# Altium PCB pcb.PcbDoc
Units mil, origin at the board's own origin, x right, y up, seen from the top; angles counter-clockwise.
Board outline 3868.3 x 3160.12 mil, 2 copper layers (Top Layer, Bottom Layer); 10 components, 15 nets, 186 pads, 0 vias.
Unrouted connection lines stored in the file: 26.
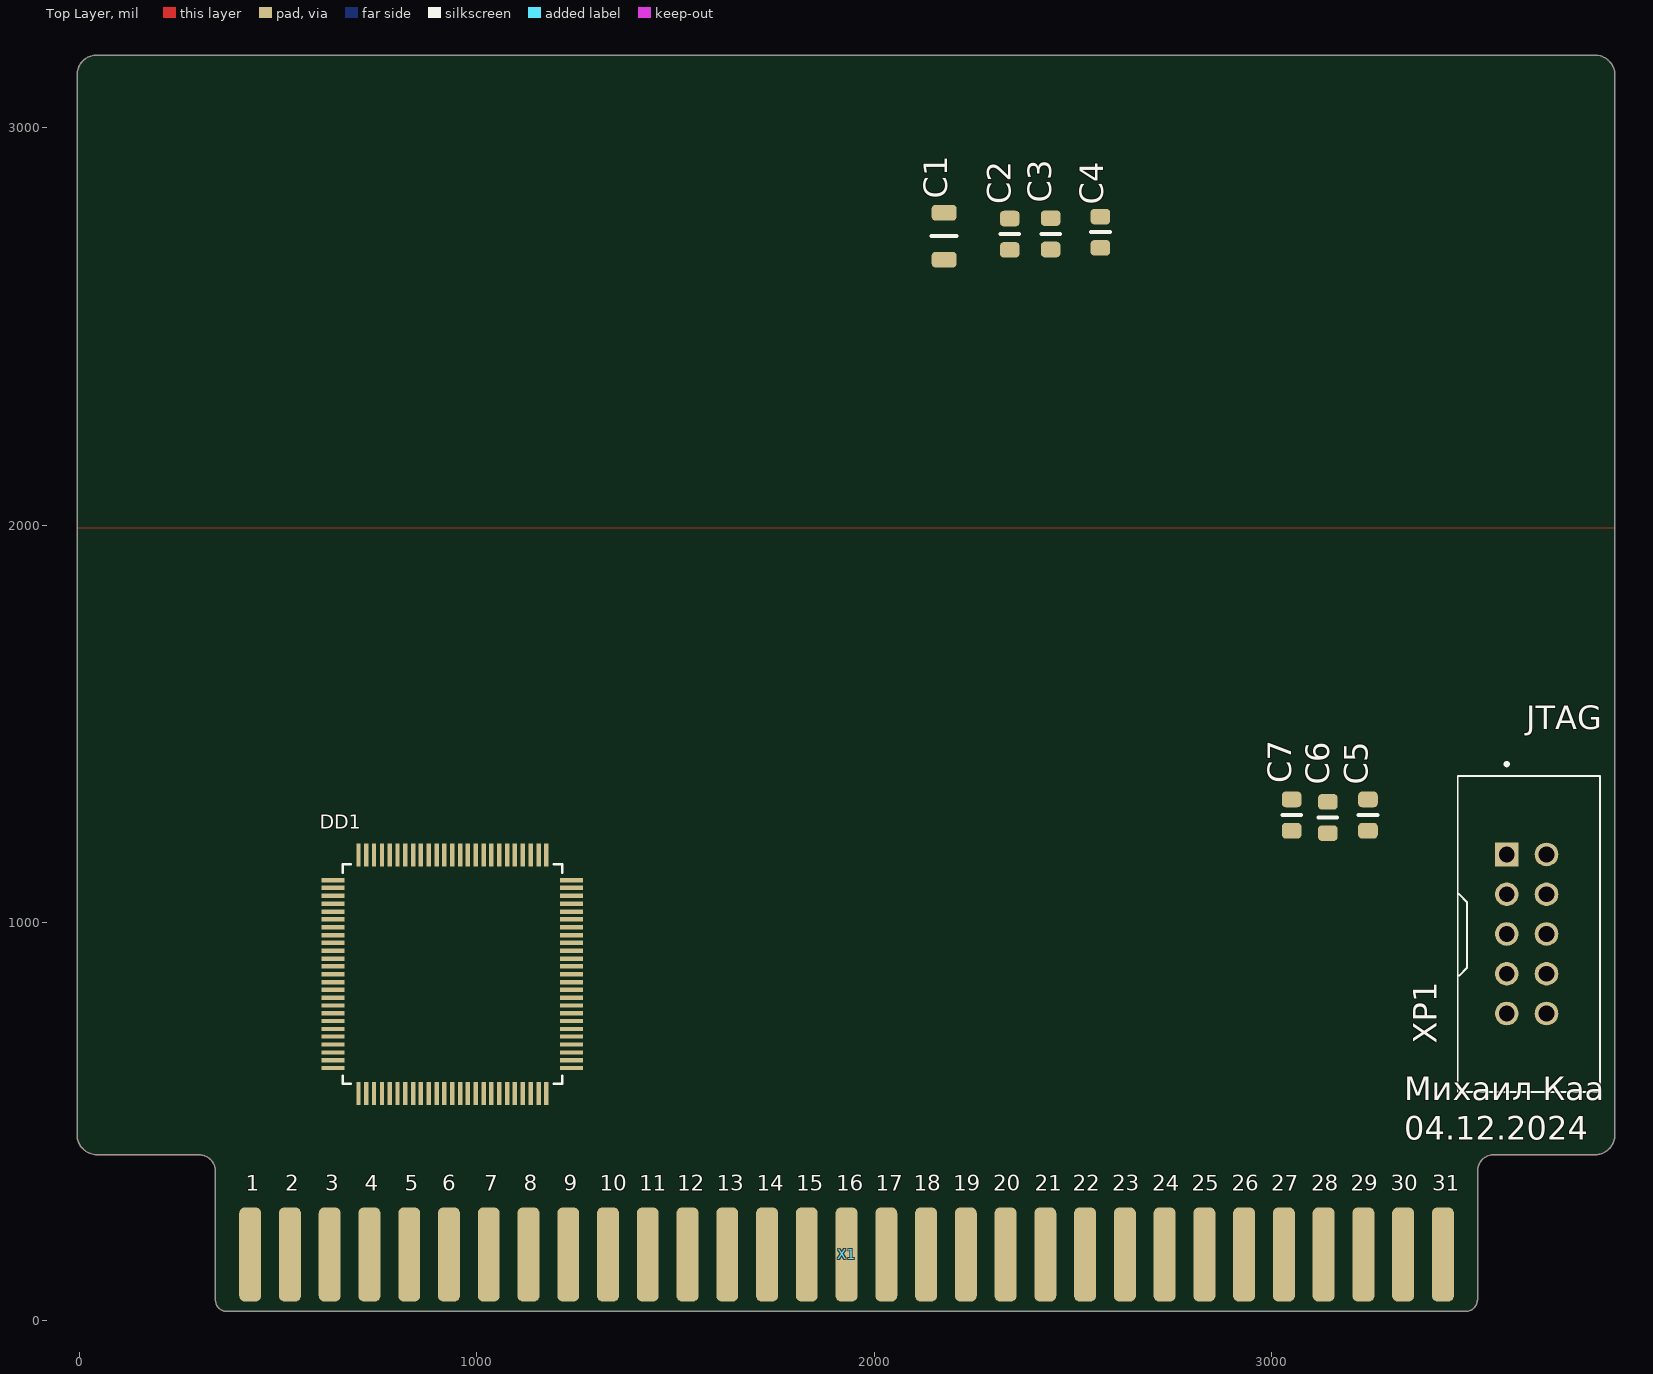
[diagram p0: Top Layer view]
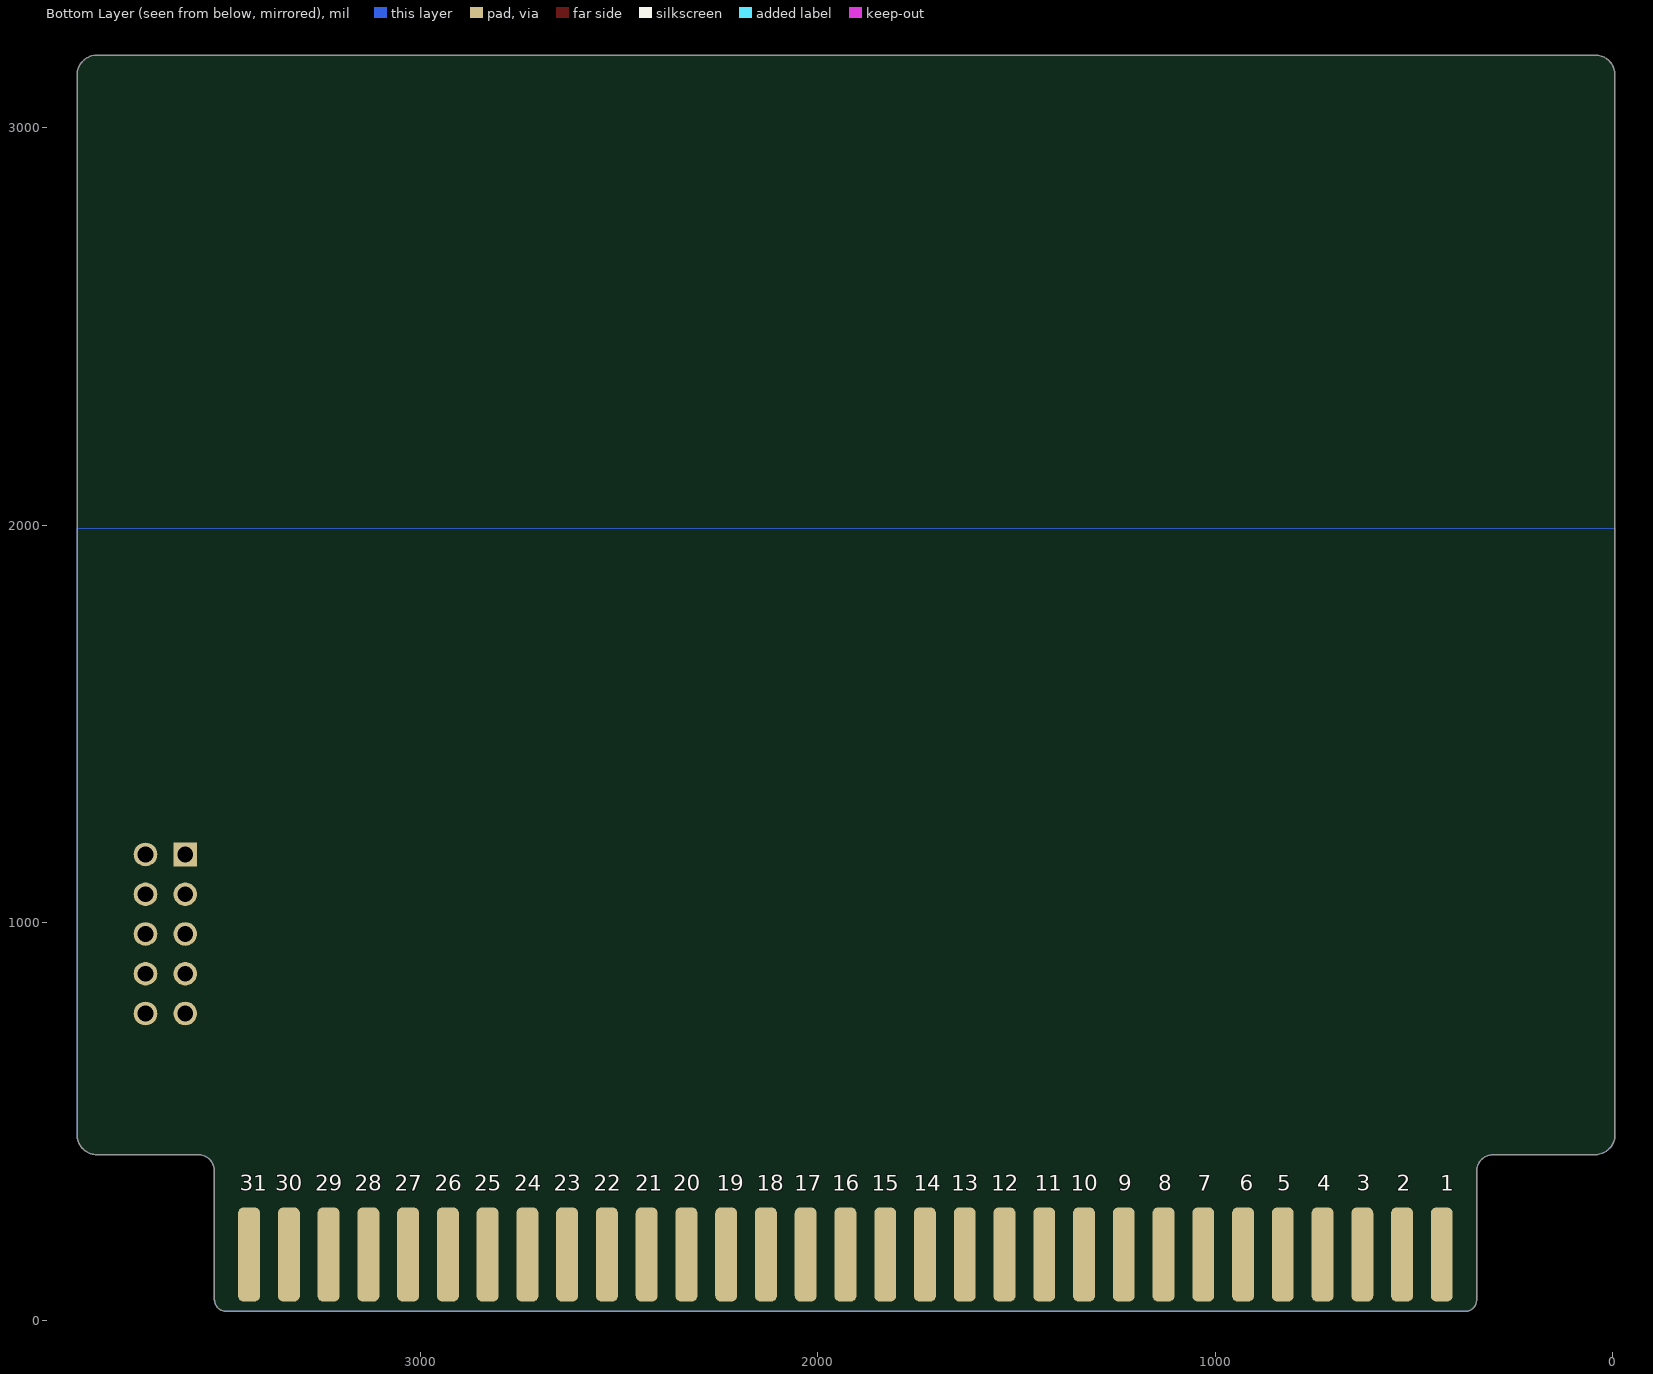
[diagram p1: Bottom Layer view, seen from below]

## Layer stack, top to bottom
Top Solder: solder mask 0.4, Solder Resist, Dk 3.5
Top Layer: signal copper 1.4
Dielectric 1: dielectric 12.6, FR-4, Dk 4.8
Bottom Layer: signal copper 1.4
Bottom Solder: solder mask 0.4, Solder Resist, Dk 3.5

## Board outline
300.36,416.69 ccw(c302.42,421.26) 302.42,416.24 cw(c302.42,375.69) 342.97,375.69 ccw(c347.98,375.69) 343.02,375.01 343.02,54.49 ccw(c348.03,54.49) 343.25,52.99 ccw(c348.03,51.49) 343.02,51.49 ccw(c371.9,51.49) 371.9,22.6 ccw(c371.9,27.62) 373.41,22.84 3490,22.84 ccw(c3490,27.85) 3491.93,23.22 ccw(c3488.51,51.9) 3517.36,50.53 ccw(c3513,53) 3518.01,53 3518.01,380 ccw(c3513,380) 3518.01,380.25 cw(c3558.36,376.24) 3555.48,416.69 3812.7,416.69 ccw(c3812.7,467.27) 3863.28,467.27 3863.28,3131.89 ccw(c3858.27,3131.89) 3863.17,3132.95 ccw(c3812.6,3131.89) 3813.82,3182.46 ccw(c3812.55,3177.61) 3812.55,3182.62 46.58,3182.62 ccw(c45.57,3177.71) 45.57,3182.72 ccw(c45.57,3132.14) -5.01,3132.14 ccw(c0,3132.14) -4.98,3131.52 ccw(c0,3130.91) -5.02,3130.91 -5.01,466.54 ccw(c0,466.54) -4.91,465.49 ccw(c45.65,467.27) 44.46,416.7 ccw(c44.83,421.7) 44.83,416.69

## Design rules (kind name [scope] priority, off if disabled: settings)
Clearance [All] p1: gap=10 ignorepadtopadclearanceinfootprint=FALSE except(0: Arc-Hole Track-Hole SMDPad-Hole THPad-Hole Via-Hole Fill-Hole Poly-Hole Region-Hole Text-Hole; 7.87: Arc-Arc Arc-Track Arc-SMDPad Track-Track Track-SMDPad SMDPad-SMDPad THPad-THPad)
PolygonConnect [All] p1: connectstyle=Relief reliefconductorwidth=10 reliefentries=4 polygonreliefangle="90 Angle" airgapwidth=10
RoomDefinition main [InComponentClass('main')] p1: confinementstyle=ConfineIn formatcopy=TRUE lockcomponents=FALSE outline 0,0 3900,0 3900,3216 0,3216
RoutingVias [All] p1: holewidth=7.87 width=15.75 viastyle="Through Hole" minholewidth=7.87 minwidth=15.75 maxholewidth=7.87 maxwidth=15.75
SolderMaskExpansion [All] p1: expansion=4
Width [All] p1: maxlimit=23.62 minlimit=7.87 preferedwidth=10 minimp=50.000000 maximp=50.000000 favimp=50.000000
30 further rules are at their usual default settings.

## Components (designator, comment, footprint, x,y, rotation, side; value= is the part's Value field where it differs from the comment)
C1 "22uF" С1206 2176,2727 r270 top
C2 "10uF" C0805 2341,2732 r270 top
C3 "10uF" C0805 2444,2733 r270 top
C4 "10uF" C0805 2569,2737 r270 top
C5 "10uF" C0805 3242,1271 r270 top
C6 "10uF" C0805 3141,1265 r270 top
C7 "10uF" C0805 3050,1271 r270 top
DD1 "EPM3128ATC100-10N" QFP50P1600X1600X120-100N 939,871 r180 top
X1 "Bus_pcb" BUS 1929.13,165.8 r0 top locked
XP1 "BH-10" BH-10 3641.04,971.94 r270 top

## Footprints (in the part's own frame and the unit in brackets; to place one, negate y for a bottom-side part, rotate by r counter-clockwise, add the part's x,y. Pads: shape width x height; smd on the part's side, far side on the other; paste and mask are expansions set on the pad)
BH-10 [mm]
  rect 1.508x1.508 / inner round 1.508 / far side rect 1.508x1.508 hole 1: 1(-5.08,-1.27)
  round 1.508 hole 1: 2(-5.08,1.27) 3(-2.54,-1.27) 4(-2.54,1.27) 5(0,-1.27) 6(0,1.27) 7(2.54,-1.27) 8(2.54,1.27) 9(5.08,-1.27) 10(5.08,1.27)
  silkscreen extent -10.95,-4.4 10.1,4.7, body extent -10.1,-4.39 10.1,4.7, height 9.09
BUS [mm]
  rrect50% 1.4x6 smd: 1(-38.065,0) 2(-35.525,0) 3(-32.985,0) 4(-30.445,0) 5(-27.905,0) 6(-25.365,0) 7(-22.825,0) 8(-20.285,0) 9(-17.745,0) 10(-15.205,0) 11(-12.665,0) 12(-10.125,0) 13(-7.585,0) 14(-5.045,0) 15(-2.505,0) 16(0.035,0) 17(2.575,0) 18(5.115,0) 19(7.655,0) 20(10.195,0) 21(12.735,0) 22(15.275,0) 23(17.815,0) 24(20.355,0) 25(22.895,0) 26(25.435,0) 27(27.975,0) 28(30.515,0) 29(33.055,0) 30(35.595,0) 31(38.135,0)
  rrect50% 1.4x6 smd far side: 32(-38.06,0) 33(-35.525,0) 34(-32.985,0) 35(-30.445,0) 36(-27.905,0) 37(-25.365,0) 38(-22.825,0) 39(-20.285,0) 40(-17.745,0) 41(-15.205,0) 42(-12.665,0) 43(-10.125,0) 44(-7.585,0) 45(-5.045,0) 46(-2.505,0) 47(0.035,0) 48(2.575,0) 49(5.115,0) 50(7.655,0) 51(10.195,0) 52(12.735,0) 53(15.275,0) 54(17.815,0) 55(20.355,0) 56(22.895,0) 57(25.435,0) 58(27.975,0) 59(30.515,0) 60(33.055,0) 61(35.595,0) 62(38.135,0)
C0805 [mm] "Chip_Capasitor_0805"
  rrect50% 1x1.25 smd mask+0.102: 1(-1,0) 2(1,0)
  silkscreen extent 0,-0.6 0,0.6, body extent -1,-0.65 1,0.65, height 1.35
QFP50P1600X1600X120-100N [mil]
  rect 58x11 smd: 1(-300,236) 2(-300,217) 3(-300,197) 4(-300,177) 5(-300,157) 6(-300,138) 7(-300,118) 8(-300,98) 9(-300,79) 10(-300,59) 11(-300,39) 12(-300,20) 13(-300,0) 14(-300,-20) 15(-300,-39) 16(-300,-59) 17(-300,-79) 18(-300,-98) 19(-300,-118) 20(-300,-138) 21(-300,-157) 22(-300,-177) 23(-300,-197) 24(-300,-217) 25(-300,-236) 51(300,-236) 52(300,-217) 53(300,-197) 54(300,-177) 55(300,-157) 56(300,-138) 57(300,-118) 58(300,-98) 59(300,-79) 60(300,-59) 61(300,-39) 62(300,-20) 63(300,0) 64(300,20) 65(300,39) 66(300,59) 67(300,79) 68(300,98) 69(300,118) 70(300,138) 71(300,157) 72(300,177) 73(300,197) 74(300,217) 75(300,236)
  rect 11x58 smd: 26(-236,-300) 27(-217,-300) 28(-197,-300) 29(-177,-300) 30(-157,-300) 31(-138,-300) 32(-118,-300) 33(-98,-300) 34(-79,-300) 35(-59,-300) 36(-39,-300) 37(-20,-300) 38(0,-300) 39(20,-300) 40(39,-300) 41(59,-300) 42(79,-300) 43(98,-300) 44(118,-300) 45(138,-300) 46(157,-300) 47(177,-300) 48(197,-300) 49(217,-300) 50(236,-300) 76(236,300) 77(217,300) 78(197,300) 79(177,300) 80(157,300) 81(138,300) 82(118,300) 83(98,300) 84(79,300) 85(59,300) 86(39,300) 87(20,300) 88(0,300) 89(-20,300) 90(-39,300) 91(-59,300) 92(-79,300) 93(-98,300) 94(-118,300) 95(-138,300) 96(-157,300) 97(-177,300) 98(-197,300) 99(-217,300) 100(-236,300)
  silkscreen extent -276,-276 276,276, body extent -315,-315 315,315, height 50
С1206 [mm] "Chip_Capasitor_1206"
  rrect50% 1x1.6 smd mask+0.102: 1(-1.5,0) 2(1.5,0)
  silkscreen extent 0,-0.8 0,0.8, body extent -1.6,-0.81 1.6,0.81, height 1.11

## Part data
C1 C2 C3 C4 C5 C6 C7: library part CapCer
DD1: "100-Pin QFP", Package=None, Availability=Unavailable, MP=EPM3128ATC100-10N, Price=None
XP1: "10 Position Total Dual Row 2.54 mm Pitch Straight Male Shrouded Box Header", Package=None, Check_prices=https://www.snapeda.com/parts/SBH11-PBPC-D05-ST-BK/Sullins+Connector+Solutions/view-part/?ref=eda, MF="Sullins Connector", MP=SBH11-PBPC-D05-ST-BK, SnapEDA_Link=https://www.snapeda.com/parts/SBH11-PBPC-D05-ST-BK/Sullins+Connector+Solutions/view-part/?ref=snap

## Nets (pads, with @x,y where several pads share a name; then routed paths per layer and width w, separated by ;. In a path a pad name is that pad's centre, name@x,y a point inside that pad or via, vN(x,y) a via of type N, cw(c..) or ccw(c..) an arc to the next point about the centre after c; other vN are vias at no path point)
+3.3V: C5.1 C6.1 C7.1 DD1.3 DD1.18 DD1.34 DD1.39 DD1.51 DD1.66 DD1.82 DD1.91 XP1.4
+5V: C1.1 C2.1 C3.1 C4.1
D0: DD1.93 X1.6
D1: DD1.94 X1.7
D2: DD1.96 X1.8
D3: DD1.99 X1.11
D4: DD1.100 X1.12
D5: DD1.98 X1.10
D6: DD1.97 X1.9
D7: DD1.92 X1.3
GND: C1.2 C2.2 C3.2 C4.2 C5.2 C6.2 C7.2 DD1.11 DD1.26 DD1.33 DD1.38 DD1.43 DD1.53 DD1.59 DD1.65 DD1.74 DD1.78 DD1.86 DD1.95 XP1.2 XP1.10
TCK: DD1.62 XP1.1
TDI: DD1.4 XP1.9
TDO: DD1.73 XP1.3
TMS: DD1.15 XP1.5
pads on no net: DD1.1 DD1.2 DD1.5 DD1.6 DD1.7 DD1.8 DD1.9 DD1.10 DD1.12 DD1.13 DD1.14 DD1.16 DD1.17 DD1.19 DD1.20 DD1.21 DD1.22 DD1.23 DD1.24 DD1.25 DD1.27 DD1.28 DD1.29 DD1.30 DD1.31 DD1.32 DD1.35 DD1.36 DD1.37 DD1.40 DD1.41 DD1.42 DD1.44 DD1.45 DD1.46 DD1.47 DD1.48 DD1.49 DD1.50 DD1.52 DD1.54 DD1.55 DD1.56 DD1.57 DD1.58 DD1.60 DD1.61 DD1.63 DD1.64 DD1.67 DD1.68 DD1.69 DD1.70 DD1.71 DD1.72 DD1.75 DD1.76 DD1.77 DD1.79 DD1.80 DD1.81 DD1.83 DD1.84 DD1.85 DD1.87 DD1.88 DD1.89 DD1.90 X1.1 X1.2 X1.4 X1.5 X1.13 X1.14 X1.15 X1.16 X1.17 X1.18 X1.19 X1.20 X1.21 X1.22 X1.23 X1.24 X1.25 X1.26 X1.27 X1.28 X1.29 X1.30 X1.31 X1.32 X1.33 X1.34 X1.35 X1.36 X1.37 X1.38 X1.39 X1.40 X1.41 X1.42 X1.43 X1.44 X1.45 X1.46 X1.47 X1.48 X1.49 X1.50 X1.51 X1.52 X1.53 X1.54 X1.55 X1.56 X1.57 X1.58 X1.59 X1.60 X1.61 X1.62 XP1.6 XP1.7 XP1.8

## Polygon pours and split planes (outlines as drawn)
GND on Bottom Layer "NONET_L02_P003" (solid, remove dead copper, shelved, pour order 3): 300.36,416.69 ccw(c302.42,421.26) 302.42,416.24 cw(c302.42,375.7) 342.97,375.69 ccw(c347.98,375.69) 343.02,375.01 343.02,54.49 ccw(c348.03,54.49) 343.25,52.99 ccw(c348.01,51.5) 343.02,51.49 ccw(c371.9,51.49) 371.9,22.6 ccw(c371.9,27.62) 373.41,22.84 3490,22.84 ccw(c3490,27.85) 3491.93,23.22 ccw(c3488.51,51.9) 3517.36,50.53 ccw(c3513.03,52.99) 3518.01,53 3518.01,380 cw(c3558.51,376.12) 3555.48,416.69 3812.7,416.69 ccw(c3812.7,467.26) 3863.28,467.27 3863.28,1993 -5.01,1993 -5.01,466.54 ccw(c-0.4,466.49) -4.91,465.49 ccw(c45.64,467.27) 44.46,416.7
GND on Top Layer "NONET_L01_P004" (solid, remove dead copper, shelved, pour order 4): 300.36,416.69 ccw(c302.42,421.26) 302.42,416.24 cw(c302.42,375.7) 342.97,375.69 ccw(c347.98,375.69) 343.02,375.01 343.02,54.49 ccw(c348.03,54.49) 343.25,52.99 ccw(c348.01,51.5) 343.02,51.49 ccw(c371.9,51.49) 371.9,22.6 ccw(c371.9,27.62) 373.41,22.84 3490,22.84 ccw(c3490,27.85) 3491.93,23.22 ccw(c3488.51,51.9) 3517.36,50.53 ccw(c3513.03,52.99) 3518.01,53 3518.01,380 cw(c3558.51,376.12) 3555.48,416.69 3812.7,416.69 ccw(c3812.7,467.26) 3863.28,467.27 3863.28,1993 -5.01,1993 -5.01,466.54 ccw(c-0.35,466.5) -4.91,465.49 ccw(c45.64,467.27) 44.46,416.7

## Other copper
Top Layer:
  pour cut-out: 3858.27,1999 3858.27,3182.46 0,3182.46 0,1999
  pour cut-out: 3858.27,0 3858.27,393.7 0,393.7 0,0
Bottom Layer:
  pour cut-out: 3858.27,0 3858.27,393.7 0,393.7 0,0
  pour cut-out: 3858.27,1999 3858.27,3182.72 0,3182.72 0,1999

## Silkscreen, mask and mechanical layers (free items; w line width, h text height)
Top Overlay:
  text "JTAG" at 3640,1467 h100
  text "Михаил Каа / 04.12.2024" at 3333,434 h100

## Text inside footprints (layer, text, board x,y; h text height)
X1: Top Overlay "1" at 419.13,325.8 h39.37; Top Overlay "2" at 519.13,325.8 h39.37; Top Overlay "4" at 719.13,325.8 h39.37; Top Overlay "3" at 619.13,325.8 h39.37; Top Overlay "7" at 1019.13,325.8 h39.37; Top Overlay "8" at 1119.13,325.8 h39.37; Top Overlay "6" at 914.13,325.8 h39.37; Top Overlay "5" at 819.13,325.8 h39.37; Top Overlay "13" at 1604.13,325.8 h39.37; Top Overlay "14" at 1704.13,325.8 h39.37; Top Overlay "16" at 1904.13,325.8 h39.37; Top Overlay "15" at 1804.13,325.8 h39.37; Top Overlay "11" at 1409.13,325.8 h39.37; Top Overlay "12" at 1504.13,325.8 h39.37; Top Overlay "10" at 1309.13,325.8 h39.37; Top Overlay "9" at 1219.13,325.8 h39.37; Top Overlay "25" at 2799.13,325.8 h39.37; Top Overlay "26" at 2899.13,325.8 h39.37; Top Overlay "28" at 3099.13,325.8 h39.37; Top Overlay "27" at 2999.13,325.8 h39.37; Top Overlay "31" at 3404.13,325.8 h39.37; Top Overlay "30" at 3299.13,325.8 h39.37; Top Overlay "29" at 3199.13,325.8 h39.37; Top Overlay "21" at 2404.13,325.8 h39.37; Top Overlay "22" at 2499.13,325.8 h39.37; Top Overlay "24" at 2699.13,325.8 h39.37; Top Overlay "23" at 2599.13,325.8 h39.37; Top Overlay "19" at 2199.13,325.8 h39.37; Top Overlay "20" at 2299.13,325.8 h39.37; Top Overlay "18" at 2099.13,325.8 h39.37; Top Overlay "17" at 2004.13,325.8 h39.37; Bottom Overlay "1" at 434.13,325.8 h39.37; Bottom Overlay "2" at 544.13,325.8 h39.37; Bottom Overlay "5" at 844.13,325.8 h39.37; Bottom Overlay "6" at 939.13,325.8 h39.37; Bottom Overlay "9" at 1244.13,325.8 h39.37; Bottom Overlay "18" at 2154.13,325.8 h39.37; Bottom Overlay "3" at 644.13,325.8 h39.37; Bottom Overlay "4" at 744.13,325.8 h39.37; Bottom Overlay "8" at 1144.13,325.8 h39.37; Bottom Overlay "7" at 1044.13,325.8 h39.37; Bottom Overlay "10" at 1364.13,325.8 h39.37; Bottom Overlay "11" at 1454.13,325.8 h39.37; Bottom Overlay "15" at 1864.13,325.8 h39.37; Bottom Overlay "14" at 1759.13,325.8 h39.37; Bottom Overlay "13" at 1664.13,325.8 h39.37; Bottom Overlay "17" at 2059.13,325.8 h39.37; Bottom Overlay "16" at 1964.13,325.8 h39.37; Bottom Overlay "20" at 2364.13,325.8 h39.37; Bottom Overlay "21" at 2459.13,325.8 h39.37; Bottom Overlay "23" at 2664.13,325.8 h39.37; Bottom Overlay "24" at 2764.13,325.8 h39.37; Bottom Overlay "27" at 3064.13,325.8 h39.37; Bottom Overlay "26" at 2964.13,325.8 h39.37; Bottom Overlay "29" at 3264.13,325.8 h39.37; Bottom Overlay "30" at 3364.13,325.8 h39.37; Bottom Overlay "31" at 3454.13,325.8 h39.37; Bottom Overlay "12" at 1564.13,325.8 h39.37; Bottom Overlay "19" at 2254.13,325.8 h39.37; Bottom Overlay "22" at 2564.13,325.8 h39.37; Bottom Overlay "28" at 3164.13,325.8 h39.37; Bottom Overlay "25" at 2864.13,325.8 h39.37